# EAGLE board Filters (EAGLE 7.1.0)
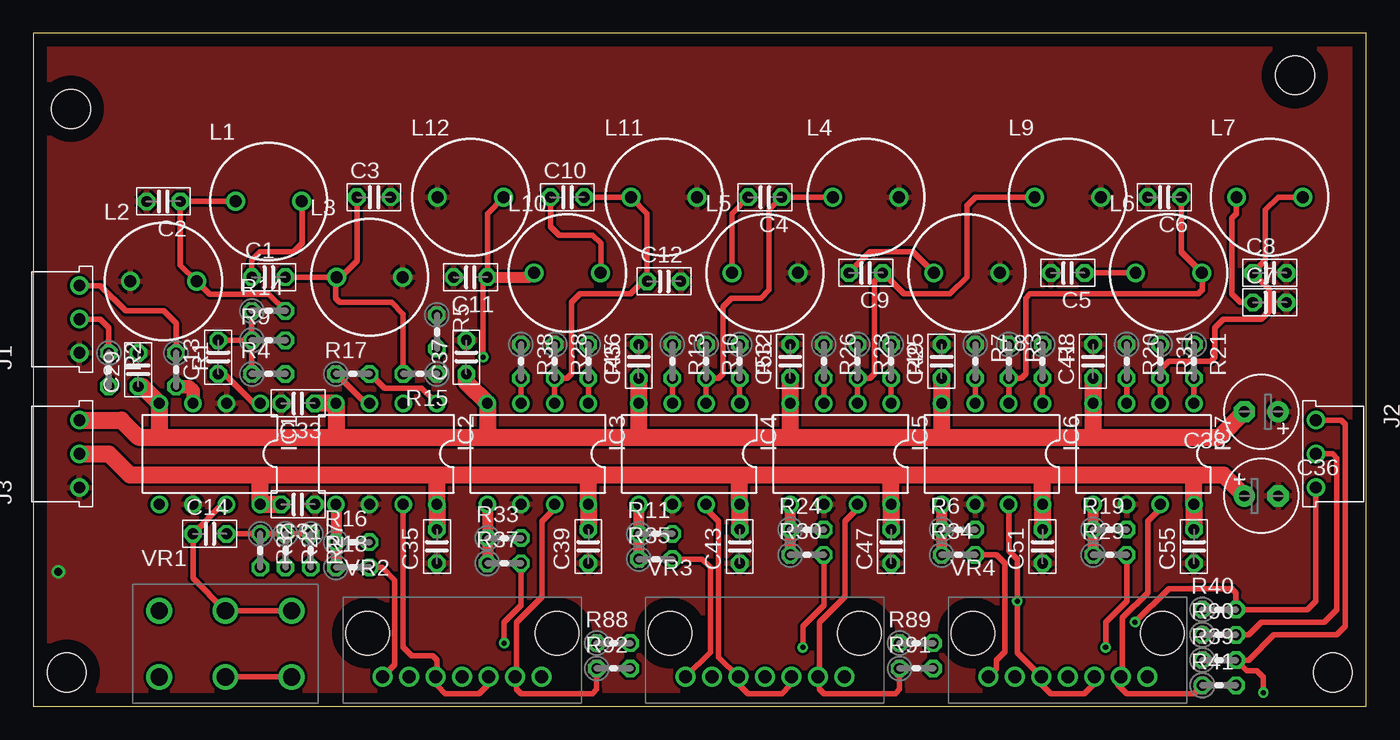
[diagram p0: board, top side]
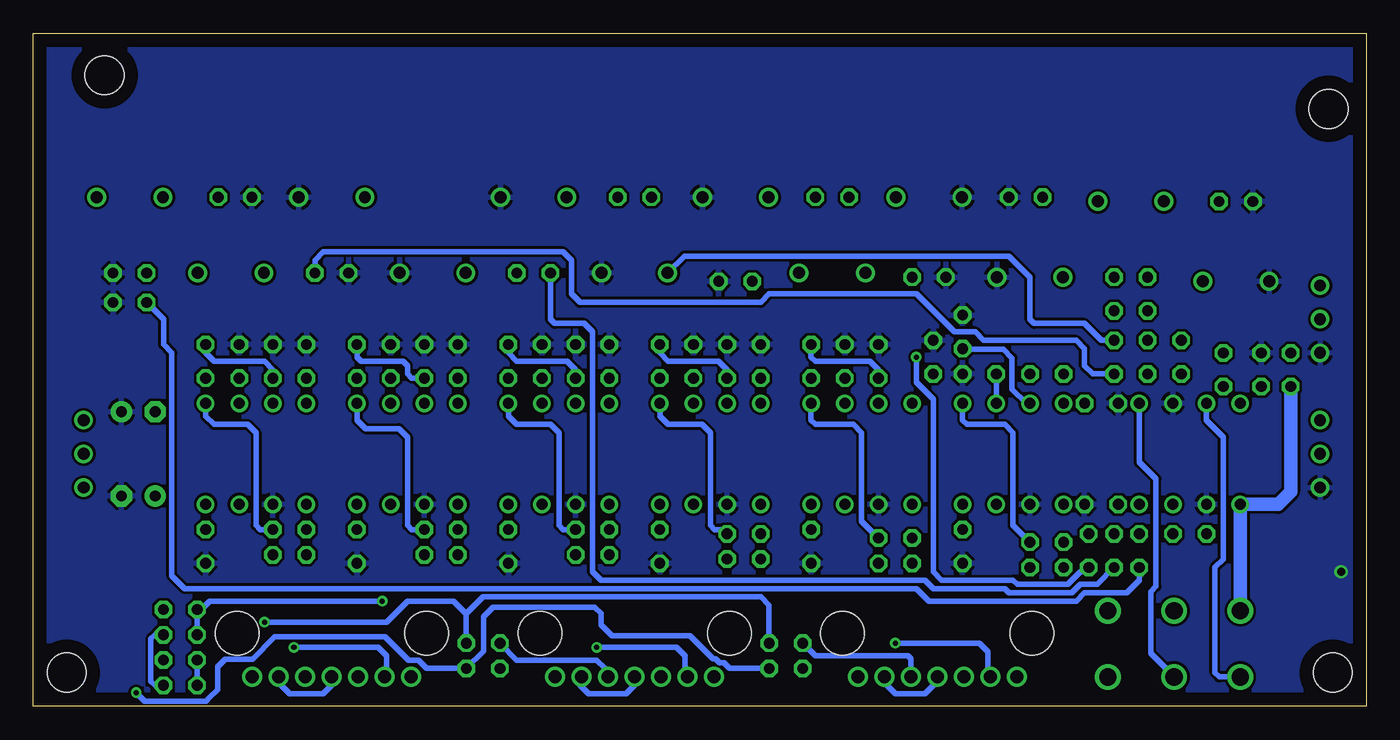
[diagram p1: board, bottom side, seen from below]

Size 100.65 x 50.8 mm. Coordinates in mm from the lower left corner, seen from the top.
Outline: 0,0 100.65,0 100.65,50.8 0,50.8 0,0
Copper layers (1*16): Top 0.035mm / dielectric 1.5mm / Bottom 0.035mm
Design rules "default": minimum track width 10mil, minimum drill 24mil, track to track 8mil, track to pad 8mil, pad to pad 8mil, via to via 8mil, smd to smd 8mil, copper to edge 40mil, drill to drill 8mil, minimum pad ring 10mil, minimum via ring 8mil, stop-mask expansion 4mil, vias tented up to drill 0mil, thermal gap 10mil
Holes 2.95 mm at 2.54,2.54 98.11,2.54 2.86,45.09 95.25,47.62

## Footprints (pad centres in the part's own frame; a part is rotated, then mirrored left to right if it is on the bottom)
C025-024X044 = drill 0.813 octagon: 1 -1.27,0; 2 1.27,0
E2,5-6 = drill 0.813 pad 1.6: + -1.27,0 | drill 0.813 pad 1.6 octagon: - 1.27,0
DIL08 = drill 0.813 pad 1.27: 1 -3.81,-3.81; 2 -1.27,-3.81; 3 1.27,-3.81; 4 3.81,-3.81; 5 3.81,3.81; 6 1.27,3.81; 7 -1.27,3.81; 8 -3.81,3.81
3_PIN_AMPCONN = drill 0.89: 1 2.54,0; 2 0,0; 3 -2.54,0
6000-XXXX-RC = drill 0.9 pad 1.422: 1 -2.5,0; 2 2.5,0
0204V = drill 0.813 octagon: 1 -1.27,0; 2 1.27,0
VOL_POT_2GANG = drill 1.3: 1 -5,-2; 1' -5,3; 2 0,-2; 2' 0,3; 3 5,-2; 3' 5,3
TONE_POT_2GANG = drill 1: 1 -6,0; 1' -4,0; 2 -2,0; 2' 0,0; 3 2,0; 3' 4,0; NC 6,0 | hole 3.3: -7.15,3.3; 7.15,3.3

## Placement (x,y rotation side)
C1  7.4uF  [C025-024X044]  17.78,32.38 0 top
C2  660nF  [C025-024X044]  9.84,38.1 180 top
C3  660nF  [C025-024X044]  25.72,38.42 0 top
C4  320nF  [C025-024X044]  55.24,38.42 180 top
C5  16uF  [C025-024X044]  78.11,32.7 180 top
C6  16uF  [C025-024X044]  85.41,38.42 180 top
C7  16uF  [C025-024X044]  93.34,30.48 0 top
C8  16uF  [C025-024X044]  93.34,32.7 0 top
C9  320nF  [C025-024X044]  62.87,32.7 180 top
C10  7.4uF  [C025-024X044]  40.32,38.42 0 top
C11  660nF  [C025-024X044]  33.02,32.38 180 top
C12  660nF  [C025-024X044]  47.62,32.07 0 top
C13  [C025-024X044]  13.97,26.35 90 top
C14  [C025-024X044]  13.34,13.02 0 top
C29  0.1uF  [C025-024X044]  7.94,25.4 90 top
C31  0.1uF  [C025-024X044]  20,15.24 180 top
C33  0.1uF  [C025-024X044]  20,22.86 180 top
C35  0.1uF  [C025-024X044]  30.48,12.06 90 top
C36  100uF  [E2,5-6]  92.71,15.88 0 top
C37  0.1uF  [C025-024X044]  32.7,26.35 90 top
C38  100uF  [E2,5-6]  92.71,22.23 180 top
C39  0.1uF  [C025-024X044]  41.91,12.06 90 top
C41  0.1uF  [C025-024X044]  80.01,26.04 90 top
C43  0.1uF  [C025-024X044]  53.34,12.06 90 top
C45  0.1uF  [C025-024X044]  45.72,26.04 90 top
C47  0.1uF  [C025-024X044]  64.77,12.06 90 top
C49  0.1uF  [C025-024X044]  68.58,26.04 90 top
C51  0.1uF  [C025-024X044]  76.2,12.06 90 top
C53  0.1uF  [C025-024X044]  57.15,26.04 90 top
C55  0.1uF  [C025-024X044]  87.63,12.06 90 top
IC1  NE5532N  [DIL08]  13.34,19.05 180 top
IC2  NE5532N  [DIL08]  26.67,19.05 180 top
IC3  NE5532N  [DIL08]  38.1,19.05 180 top
IC4  NE5532N  [DIL08]  49.53,19.05 180 top
IC5  NE5532N  [DIL08]  60.96,19.05 180 top
IC6  NE5532N  [DIL08]  72.39,19.05 180 top
IC7  NE5532N  [DIL08]  83.82,19.05 180 top
J1  3_PIN_AMPCONN  [3_PIN_AMPCONN]  3.49,29.21 90 top
J2  3_PIN_AMPCONN  [3_PIN_AMPCONN]  96.84,19.05 270 top
J3  3_PIN_AMPCONN  [3_PIN_AMPCONN]  3.49,19.05 90 top
L1  3.3mH  [6000-XXXX-RC]  17.78,38.1 0 top
L2  38mH  [6000-XXXX-RC]  9.84,32.07 0 top
L3  38mH  [6000-XXXX-RC]  25.4,32.38 0 top
L4  1.5mH  [6000-XXXX-RC]  62.87,38.42 0 top
L5  1.5mH  [6000-XXXX-RC]  55.24,32.7 0 top
L6  80mH  [6000-XXXX-RC]  85.72,32.7 0 top
L7  80mH  [6000-XXXX-RC]  93.34,38.42 0 top
L8  1.5mH  [6000-XXXX-RC]  70.48,32.7 180 top
L9  1.5mH  [6000-XXXX-RC]  78.11,38.42 0 top
L10  3.3mH  [6000-XXXX-RC]  40.32,32.7 0 top
L11  38mH  [6000-XXXX-RC]  47.62,38.42 0 top
L12  38mH  [6000-XXXX-RC]  33.02,38.42 0 top
R1  10k  [0204V]  10.79,25.4 270 top
R2  10k  [0204V]  5.71,25.4 270 top
R3  50  [0204V]  73.66,26.04 270 top
R4  50  [0204V]  17.78,25.08 0 top
R5  1k  [0204V]  30.48,28.26 270 top
R6  10k  [0204V]  69.85,13.34 0 top
R7  1k  [0204V]  71.12,26.04 270 top
R8  1k  [0204V]  76.2,26.04 270 top
R9  50  [0204V]  17.78,27.62 0 top
R10  50  [0204V]  50.8,26.04 270 top
R11  10k  [0204V]  46.99,13.02 0 top
R12  1k  [0204V]  53.34,26.04 270 top
R13  1k  [0204V]  48.26,26.04 270 top
R14  50  [0204V]  17.78,29.84 0 top
R15  50  [0204V]  29.21,25.08 180 top
R16  10k  [0204V]  24.13,12.38 0 top
R17  1k  [0204V]  24.13,25.08 0 top
R18  2k  [0204V]  24.13,10.48 0 top
R19  10k  [0204V]  81.28,13.34 0 top
R20  1k  [0204V]  82.55,26.04 270 top
R21  1k  [0204V]  87.63,26.04 270 top
R22  50  [0204V]  19.05,11.75 270 top
R23  50  [0204V]  62.23,26.04 270 top
R24  10k  [0204V]  58.42,13.34 0 top
R25  1k  [0204V]  64.77,26.04 270 top
R26  1k  [0204V]  59.69,26.04 270 top
R27  50  [0204V]  20.95,11.75 270 top
R28  50  [0204V]  39.37,26.04 270 top
R29  2k  [0204V]  81.28,11.43 0 top
R30  2k  [0204V]  58.42,11.43 0 top
R31  50  [0204V]  85.09,26.04 270 top
R32  50  [0204V]  17.14,11.75 270 top
R33  10k  [0204V]  35.56,12.7 0 top
R34  2k  [0204V]  69.85,11.43 0 top
R35  2k  [0204V]  46.99,11.11 0 top
R36  1k  [0204V]  41.91,26.04 270 top
R37  2k  [0204V]  35.56,10.79 0 top
R38  1k  [0204V]  36.83,26.04 270 top
R39  100  [0204V]  89.53,3.49 0 top
R40  100  [0204V]  89.53,7.3 0 top
R41  100  [0204V]  89.53,1.59 0 top
R88  100  [0204V]  43.81,4.76 0 top
R89  100  [0204V]  66.67,4.76 0 top
R90  100  [0204V]  89.53,5.4 0 top
R91  100  [0204V]  66.67,2.86 0 top
R92  100  [0204V]  43.81,2.86 0 top
VR1  10k  [VOL_POT_2GANG]  14.51,4.21 0 top
VR2  10k  [TONE_POT_2GANG]  32.38,2.22 0 top
VR3  10k  [TONE_POT_2GANG]  55.24,2.22 0 top
VR4  10k  [TONE_POT_2GANG]  78.11,2.22 0 top

## Library data of the parts
C1-C14 C29 C31 C33 C35-C39 C41 C43 C45 C47 C49 C51 C53 C55 L1-L12 R1-R41 R88-R92 = rcl
IC1-IC7 = linear
J1-J3 VR1-VR4 = Amplifier_Parts

## Nets
+12V: C31.2 C35.2 C36.+ C39.2 C43.2 C47.2 C51.2 C55.2 IC1.8 IC2.8 IC3.8 IC4.8 IC5.8 IC6.8 IC7.8 J3.2
-12V: C29.1 C33.1 C37.1 C38.- C41.1 C45.1 C49.1 C53.1 IC1.4 IC2.4 IC3.4 IC4.4 IC5.4 IC6.4 IC7.4 J3.1
GND: C2.2 C3.2 C5.2 C6.2 C7.2 C8.2 C11.2 C12.2 C29.2 C31.1 C33.2 C35.1 C36.- C37.2 C38.+ C39.1 C41.2 C43.1 C45.2 C47.1 C49.2 C51.1 C53.2 C55.1 IC1.2 IC1.6 IC2.6 IC3.6 IC4.6 IC5.6 IC6.6 IC7.6 J1.3 J3.3 L2.1 L3.2 L4.2 L5.2 L8.1 L9.2 L11.2 L12.1 R3.1 R5.1 R7.1 R10.1 R13.1 R15.1 R20.1 R23.1 R26.1 R28.1 R31.1 R38.1
MVO: IC6.7 R40.1 R90.1 VR4.2 VR4.3
N$1: IC1.3 R1.2 VR1.1
N$2: C13.1 IC1.1 VR1.2 VR1.3
N$3: IC1.5 R2.2 VR1.1'
N$4: IC2.5 R16.1 R18.1
N$5: C14.1 IC1.7 VR1.2' VR1.3'
N$6: IC6.3 R7.2 R8.1
N$7: C6.1 IC6.2 L6.2 R3.2
N$8: IC3.5 R33.1 R37.1
N$9: IC4.3 R12.1 R13.2
N$10: J2.1 R40.2 R88.2 R89.2
N$11: IC6.5 R6.1 R34.1
N$12: C5.1 L6.1 R4.2
N$13: C4.2 L5.1 R9.2
N$14: C8.1 IC7.2 L7.2 R31.2
N$15: IC2.1 R16.2 R17.2
N$17: IC4.1 R11.2 R12.2
N$18: IC4.5 R11.1 R35.1
N$19: J2.2 R41.2 R90.2
N$21: IC2.7 R88.1 VR2.2 VR2.3
N$22: C13.2 R4.1 R9.1 R14.1
N$23: C2.1 L1.1 L2.2 R14.2
N$24: R18.2 VR2.1
N$25: IC7.5 R19.1 R29.1
N$26: J1.1 R1.1
N$27: IC2.3 R5.2 R17.1
N$29: C1.1 L1.2
N$30: C9.2 L8.2 R22.2
N$32: IC5.1 R24.2 R25.2
N$33: IC5.5 R24.1 R30.1
N$34: C11.1 L10.1 L12.2 R27.2
N$35: C10.1 L10.2
N$37: R29.2 VR4.1'
N$38: J2.3 R39.2 R91.2 R92.2
N$41: IC5.7 R91.1 VR3.2' VR3.3'
N$42: R30.2 VR3.1'
N$43: IC7.1 R19.2 R21.2
N$44: C7.1 L7.1 R32.2
N$45: IC7.3 R20.2 R21.1
N$46: IC5.3 R25.1 R26.2
N$47: IC3.1 R33.2 R36.2
N$50: IC3.7 R92.1 VR2.2' VR2.3'
N$53: R34.2 VR4.1
N$55: IC4.7 R89.1 VR3.2 VR3.3
N$56: R35.2 VR3.1
N$57: R37.2 VR2.1'
N$58: IC3.3 R36.1 R38.2
N$59: C10.2 C12.1 IC3.2 L11.1 R28.2
N$60: C14.2 R22.1 R27.1 R32.1
N$61: C9.1 IC5.2 L9.1 R23.2
N$63: C4.1 IC4.2 L4.1 R10.2
N$64: IC7.7 R39.1 R41.1 VR4.2' VR4.3'
N$88: IC6.1 R6.2 R8.2
N$104: C1.2 C3.1 IC2.2 L3.1 R15.2
N$108: J1.2 R2.1

## Tracks (layer width: path | path; a pad name or v marks a point on that pad's centre or on a via)
+12V
  Top 1.27: J3.2 5.71,19.05 7.3,17.46 16.83,17.46 | 16.83,17.46 30.48,17.46 | 30.48,17.46 41.59,17.46 | 41.59,17.46 53.34,17.46 | 53.34,17.46 64.77,17.46 | 64.77,17.46 76.2,17.46 | 76.2,17.46 87.95,17.46 | 87.95,17.46 89.85,17.46 C36.+ | 30.48,17.46 IC2.8 C35.2 | 41.59,17.46 41.91,17.14 IC3.8 C39.2 | 53.34,17.46 IC4.8 C43.2 | 76.2,17.46 IC6.8 C51.2 | 87.95,17.46 87.63,17.14 IC7.8 C55.2 | 16.83,17.46 17.14,17.14 IC1.8 C31.2 | 64.77,17.46 IC5.8 C47.2
-12V
  Top 1.27: J3.1 6.67,21.59 7.94,20.32 9.21,20.32 | 9.21,20.32 23.18,20.32 | 23.18,20.32 34.29,20.32 | 34.29,20.32 45.72,20.32 | 45.72,20.32 57.47,20.32 | 57.47,20.32 68.58,20.32 | 68.58,20.32 80.01,20.32 | 80.01,20.32 89.53,20.32 C38.- | 23.18,20.32 22.86,20.64 IC2.4 C33.1 | 34.29,20.32 IC3.4 32.7,24.45 C37.1 | 45.72,20.32 IC4.4 C45.1 | 57.47,20.32 57.15,20.64 IC5.4 C53.1 | 80.01,20.32 IC7.4 C41.1 | 9.21,20.32 9.53,20.64 IC1.4 8.26,24.13 C29.1 | 68.58,20.32 IC6.4 C49.1
GND  (via drill 0.6)
  other vias: 1.91,10.16
  pour Top: 0,0 100.65,0 100.65,50.8 0,50.8
  pour Bottom: 0,0 100.97,-0.32 100.97,50.48 0,50.8
MVO  (via drill 0.38)
  Top 0.406: IC6.7 73.66,11.75 74.3,11.11 v74.3,7.94 74.3,7.62 74.3,4.03 VR4.2 76.11,1.68 76.83,0.95 79.38,0.95 80.01,1.59 80.01,2.13 VR4.3
  Bottom 0.406: R90.1 R40.1 87.95,7.3 87.31,7.94 v74.3,7.94
N$1
  Top 1.016: R1.2 11.75,24.13 12.06,23.81 IC1.3
  Bottom 0.406: VR1.1 11.1,2.21 11.43,2.54 11.43,10.48 10.79,11.11 10.79,20.32 12.06,21.59 IC1.3
N$2
  Top 0.406: IC1.1 16.64,22.86 14.42,25.08 C13.1 | VR1.2 VR1.3
  Bottom 0.406: VR1.2 16.29,3.99 16.29,8.66 15.89,9.06 15.89,17.16 17.14,18.41 17.14,18.92 IC1.1
N$3
  Bottom 1.016: R2.2 5.71,16.19 6.67,15.24 IC1.5 9.53,7.22 VR1.1'
N$4
  Top 0.813: IC2.5 R16.1 R18.1
N$5
  Top 0.406: VR1.3' VR1.2' 12.06,9.66 C14.1 14.29,15.24 IC1.7
N$6
  Top 0.406: R7.2 IC6.3
  Bottom 0.406: R7.2 72.07,24.77 72.39,25.08 72.39,25.72 72.71,26.04 75.88,26.04 76.2,26.35 R8.1
N$7
  Top 0.406: C6.1 86.68,34.25 | 86.68,34.25 L6.2 | IC6.2 R3.2 74.61,24.77 74.93,25.08 74.93,30.8 75.25,31.11 87.95,31.11 88.27,31.43 88.27,32.7 86.72,34.25 86.68,34.25
N$8
  Top 0.813: IC3.5 R33.1 R37.1
N$9
  Top 0.406: R13.2 IC4.3
  Bottom 0.406: R13.2 48.26,25.4 48.9,26.04 52.7,26.04 53.34,26.67 R12.1
N$10  (via drill 0.38)
  Top 0.406: J2.1 96.84,7.94 96.2,7.3 R40.2 90.81,8.57 90.49,8.89 85.72,8.89 v83.19,6.35
  Bottom 0.406: v83.19,6.35 73.98,6.35 72.39,7.94 68.9,7.94 67.94,6.99 | 67.94,6.99 R89.2 | R88.2 45.09,7.62 45.72,8.26 66.67,8.26 67.94,6.99
N$11
  Top 0.813: IC6.5 R6.1 R34.1
N$12
  Top 0.406: C5.1 L6.1
  Bottom 0.406: R4.2 20.64,25.08 21.27,25.72 21.27,26.99 21.91,27.62 28.89,27.62 29.53,28.26 31.11,28.26 33.97,31.11 45.09,31.11 45.72,30.48 59.37,30.48 60.01,31.11 60.01,33.66 60.64,34.29 78.74,34.29 79.38,33.66 C5.1
N$13
  Top 0.406: C4.2 52.74,37.19 L5.1
  Bottom 0.406: R9.2 20,27.62 21.27,28.89 25.08,28.89 25.4,29.21 25.4,32.38 26.99,33.97 51.48,33.97 L5.1
N$14
  Top 0.406: L7.2 93.98,38.42 93.03,37.47 93.03,33.66 C8.1 93.34,31.43 93.34,29.84 92.71,29.21 89.85,29.21 89.22,28.57 89.22,26.35 88.9,26.04 85.72,26.04 85.09,25.4 R31.2 IC7.2
N$15
  Top 0.406: R17.2 25.45,25.08 26.52,24.02 29.32,24.02 IC2.1
  Bottom 0.406: IC2.1 30.48,21.59 30.16,21.27 27.3,21.27 26.67,20.64 26.67,13.65 R16.2
N$17
  Top 0.406: R12.2 IC4.1
  Bottom 0.406: IC4.1 53.34,21.91 52.7,21.27 50.16,21.27 49.53,20.64 49.53,13.65 49.21,13.34 48.58,13.34 R11.2
N$18
  Top 0.813: IC4.5 R11.1 R35.1
N$19
  Top 0.406: R90.2 91.76,5.4 92.71,6.35 97.47,6.35 98.42,7.3 98.42,18.73 98.11,19.05 J2.2
  Bottom 0.406: R90.2 91.44,5.4 91.76,5.08 91.76,1.91 91.44,1.59 R41.2
N$21
  Top 0.406: IC2.7 27.94,4.45 28.57,3.81 30.16,3.81 30.48,3.49 30.48,2.32 | 30.48,2.32 30.48,1.59 31.11,0.95 33.66,0.95 34.29,1.59 34.29,2.13 VR2.3 | 30.48,2.32 VR2.2
  Bottom 0.406: VR2.3 34.38,3.59 34.61,3.81 41.59,3.81 R88.1
N$22
  Top 0.406: C13.2 R9.1 | R9.1 R14.1 | R9.1 R4.1
N$23
  Top 0.406: L1.1 C2.1 11.11,33.3 L2.2 13.31,31.1 17.8,31.1 R14.2
N$24
  Top 0.406: R18.2 26.35,10.48 27.3,9.53 27.3,3.14 VR2.1
N$25
  Top 0.813: IC7.5 R19.1 R29.1
N$26
  Top 0.406: J1.1 5.08,31.75 6.99,29.84 9.84,29.84 10.79,28.89 R1.1
N$27
  Top 0.406: IC2.3 25.08,22.86 R17.1
  Bottom 0.406: IC2.3 25.67,22.86 26.74,23.93 26.74,26.28 27.4,26.94 30.43,26.94 R5.2
N$29
  Top 0.406: C1.1 16.51,33.66 17.14,34.29 19.68,34.29 20.32,34.92 20.32,38.06
  Top 0.813: 20.32,38.06 L1.2
N$30
  Top 0.406: L8.2 66.4,34.29 63.18,34.29 C9.2
  Bottom 0.406: C9.2 61.59,29.21 61.28,28.89 59.05,28.89 58.42,28.26 58.42,10.16 57.78,9.53 33.34,9.53 32.7,8.89 27.3,8.89 26.99,8.57 22.23,8.57 21.59,9.21 20.32,9.21 R22.2
N$32
  Top 0.406: R25.2 IC5.1
  Bottom 0.406: IC5.1 64.77,21.91 64.14,21.27 61.59,21.27 60.96,20.64 60.96,13.65 60.64,13.34 R24.2
N$33
  Top 0.813: IC5.5 R24.1 R30.1
N$34  (via drill 0.38)
  Top 0.406: L12.2 34.29,37.19 C11.1 33.97,32.07 v33.97,26.35
  Top 0.813: C11.1 37.51,32.38 L10.1
  Bottom 0.406: v33.97,26.35 33.97,24.45 32.7,23.18 32.7,10.16 32.07,9.53 26.67,9.53 26.35,9.21 22.54,9.21 21.59,10.16 21.27,10.16 R27.2
N$35
  Top 0.406: C10.1 39.05,36.2 39.69,35.56 42.23,35.56 42.86,34.92 42.86,32.74 L10.2
N$37  (via drill 0.38)
  Top 0.406: R29.2 82.55,7.94 80.96,6.35 v80.96,4.45
  Bottom 0.406: v80.96,4.45 74.61,4.45 73.98,3.81 73.98,2.35 VR4.1'
N$38  (via drill 0.38)
  Top 0.406: J2.3 98.74,21.59 99.06,21.27 99.06,6.03 98.42,5.4 93.66,5.4 91.76,3.49 R39.2 91.61,2.69 92.38,2.69 92.87,2.2 v92.87,1.03
  Bottom 0.406: v92.87,1.03 92.23,0.4 87.57,0.4 87.34,0.63 86.71,1.26 86.71,3 86.15,3.56 84.08,3.56 82.4,5.24 74.09,5.24 72.31,3.46 71.55,3.46 70.95,2.86 R91.2 66.65,4.15 66.65,6.78 65.94,7.49 58.26,7.49 57.78,7.02 57.78,6.17 56.95,5.33 51.06,5.33 49.34,3.6 49.15,3.6 48.83,3.29 48.49,3.29 48.07,2.86 R92.2
N$41
  Top 0.406: IC5.7 62.23,14.92 61.28,13.97 61.28,8.26 59.37,6.35 59.37,2.35 | 59.37,2.35 VR3.3' | 59.37,2.35 59.37,1.27 59.69,0.95 65.09,0.95 65.41,1.27 R91.1
  Bottom 0.406: VR3.2' 55.24,1.59 55.88,0.95 58.74,0.95 59.37,1.59 59.37,2.1 VR3.3'
N$42  (via drill 0.38)
  Top 0.406: R30.2 59.69,7.62 58.1,6.03 v58.1,4.45
  Bottom 0.406: v58.1,4.45 52.07,4.45 51.44,3.81 51.44,2.41 VR3.1'
N$43
  Top 0.406: R21.2 IC7.1
  Bottom 0.406: IC7.1 87.63,21.91 87,21.27 84.45,21.27 83.82,20.64 83.82,13.65 83.5,13.34 R19.2
N$44
  Top 0.406: L7.1 90.84,37.19 90.49,36.83 90.49,31.11 91.12,30.48 C7.1
  Bottom 0.406: C7.1 90.81,29.21 90.81,27.3 90.17,26.67 90.17,9.84 89.85,9.53 89.53,9.21 89.22,8.89 33.97,8.89 33.02,7.94 21.91,7.94 21.27,8.57 18.1,8.57 17.14,9.53 R32.2
N$45
  Top 0.406: R20.2 IC7.3
  Bottom 0.406: R20.2 82.55,25.4 83.19,26.04 87,26.04 87.63,26.67 R21.1
N$46
  Top 0.406: R26.2 IC5.3
  Bottom 0.406: R26.2 59.69,25.4 60.33,26.04 64.14,26.04 64.77,26.67 R25.1
N$47
  Top 0.406: R36.2 IC3.1
  Bottom 0.406: IC3.1 41.91,21.59 41.59,21.27 38.73,21.27 38.1,20.64 38.1,13.97 R33.2
N$50
  Top 0.406: IC3.7 39.37,14.92 38.42,13.97 38.42,8.26 36.51,6.35 36.51,2.35 | 36.51,2.35 VR2.3' | 36.51,2.35 36.51,1.27 36.83,0.95 42.23,0.95 42.55,1.27 R92.1
  Bottom 0.406: VR2.2' 32.38,1.91 33.34,0.95 35.56,0.95 36.2,1.59 36.2,2.03 VR2.3'
N$53
  Top 0.406: R34.2 72.71,11.43 73.34,10.79 73.34,4.13 72.71,3.49 72.71,2.83 VR4.1
N$55
  Top 0.406: IC4.7 50.8,14.92 51.75,13.97 51.75,3.71 VR3.2 53.24,1.68 53.98,0.95 56.52,0.95 57.15,1.59 57.15,2.13 VR3.3
  Bottom 0.406: R89.1 64.14,3.49 58.1,3.49 57.47,2.86 57.47,2.44 VR3.3
N$56
  Top 0.406: R35.2 50.48,11.11 51.12,10.48 51.12,4.09 VR3.1
N$57  (via drill 0.38)
  Top 0.406: R37.2 36.83,7.62 35.56,6.35 v35.56,4.76
  Bottom 0.406: v35.56,4.76 29.21,4.76 28.57,4.13 28.57,2.41 VR2.1'
N$58
  Top 0.406: R38.2 IC3.3
  Bottom 0.406: R38.2 36.83,25.4 37.47,26.04 41.59,26.04 41.91,26.35 R36.1
N$59
  Top 0.406: C10.2 L11.1 46.35,37.19 C12.1 46.04,32.07 45.09,31.11 41.27,31.11 40.64,30.48 40.64,25.08 40.32,24.77 R28.2 IC3.2
N$60
  Top 0.406: C14.2 R32.1 R27.1 R22.1
N$61
  Top 0.406: L9.1 71.12,38.42 70.48,37.78 70.48,32.38 69.22,31.11 65.72,31.11 C9.1 63.5,32.07 63.5,25.08 63.18,24.77 R23.2 IC5.2
N$63
  Top 0.406: L4.1 C4.1 55.56,37.47 55.56,31.43 54.93,30.8 52.7,30.8 52.07,30.16 52.07,25.08 51.75,24.77 R10.2 IC4.2
N$64
  Top 0.406: IC7.7 85.09,14.92 84.14,13.97 84.14,8.57 82.23,6.67 82.23,2.35 VR4.3' 81.92,2.03 81.92,1.59 82.55,0.95 87.63,0.95 R41.1
  Bottom 0.406: VR4.2' 78.11,1.59 78.74,0.95 81.28,0.95 81.92,1.59 81.92,2.03 VR4.3' | R39.1 R41.1
N$88
  Top 0.406: R8.2 IC6.1
  Bottom 0.406: IC6.1 76.2,21.59 75.56,20.95 73.03,20.95 72.39,20.32 72.39,13.65 72.07,13.34 R6.2
N$104
  Top 0.406: C3.1 24.45,33.62 23.22,32.38 | C1.2 L3.1 22.84,32.01 22.84,30.8 23.15,30.49 27.05,30.49 27.94,29.6 R15.2
  Top 0.813: L3.1 23.22,32.38
  Bottom 0.406: R15.2 IC2.2
N$108
  Top 0.406: J1.2 5.08,29.21 5.71,28.57 R2.1